# Allegro board shensen hv mppc_carrier.brd
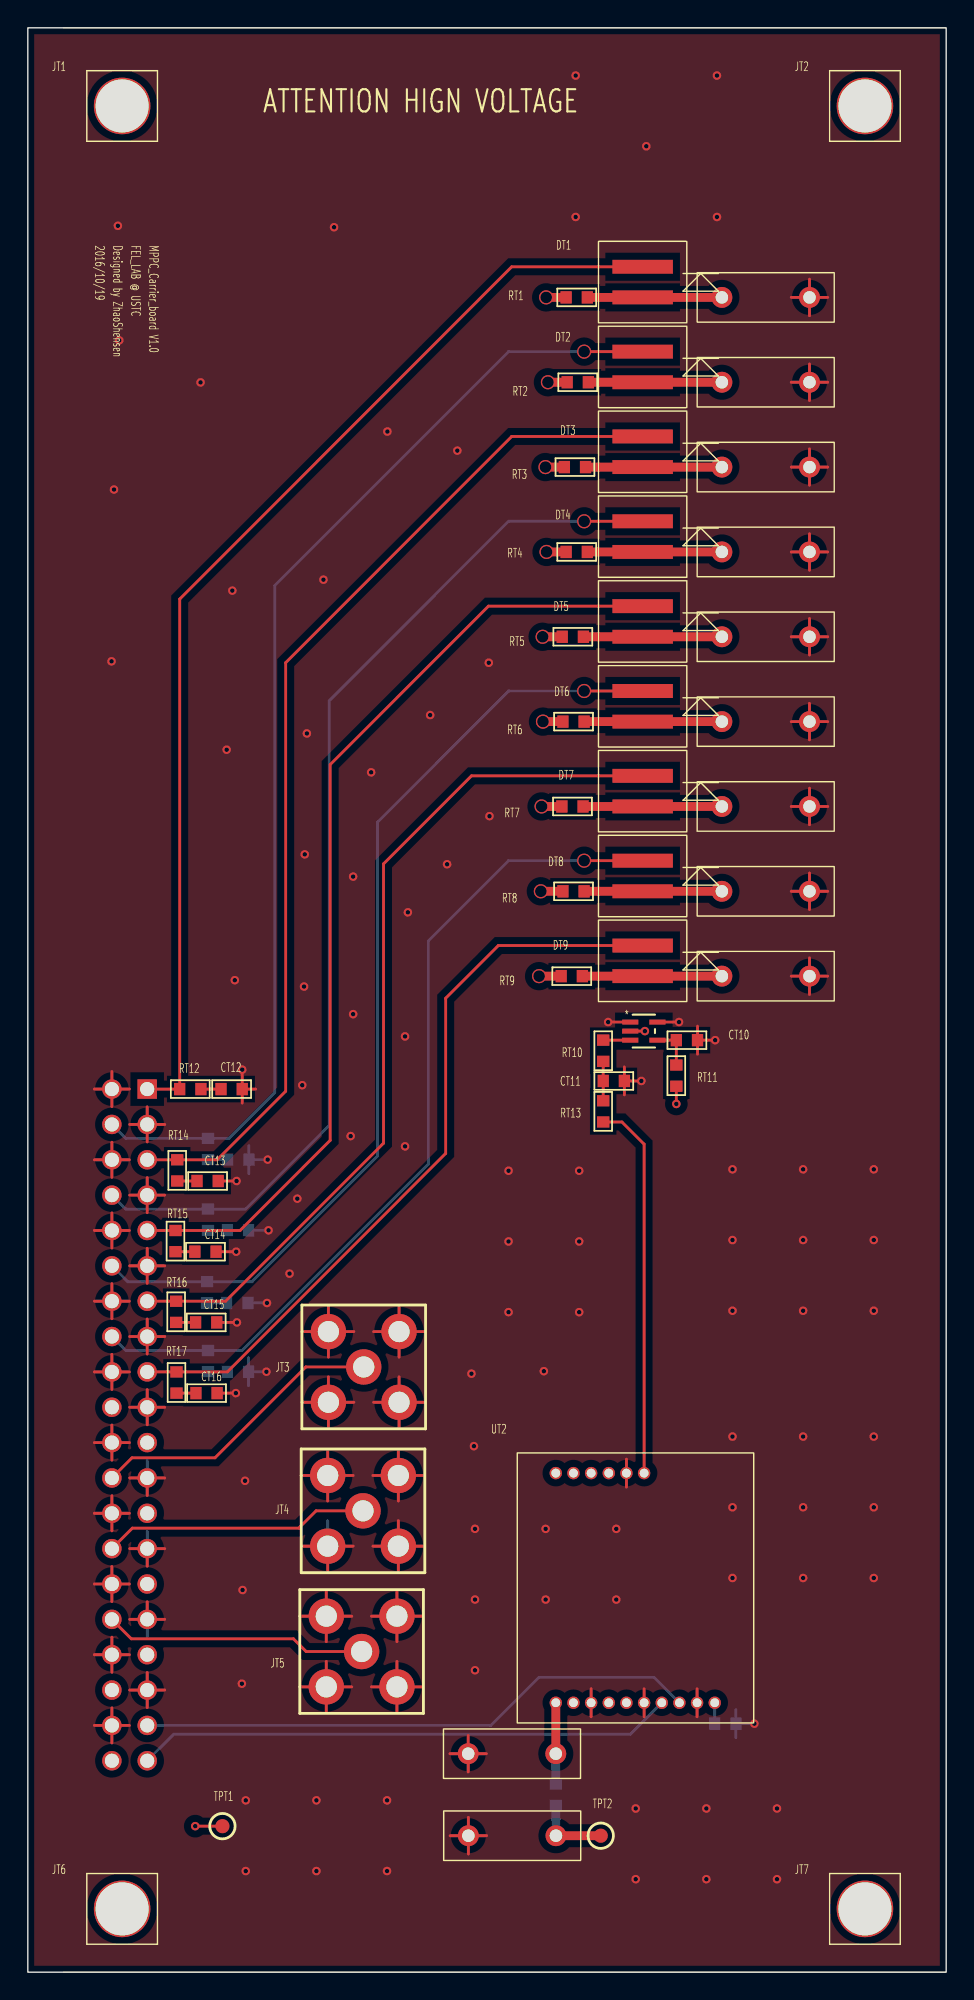
[diagram p0: board, top side]
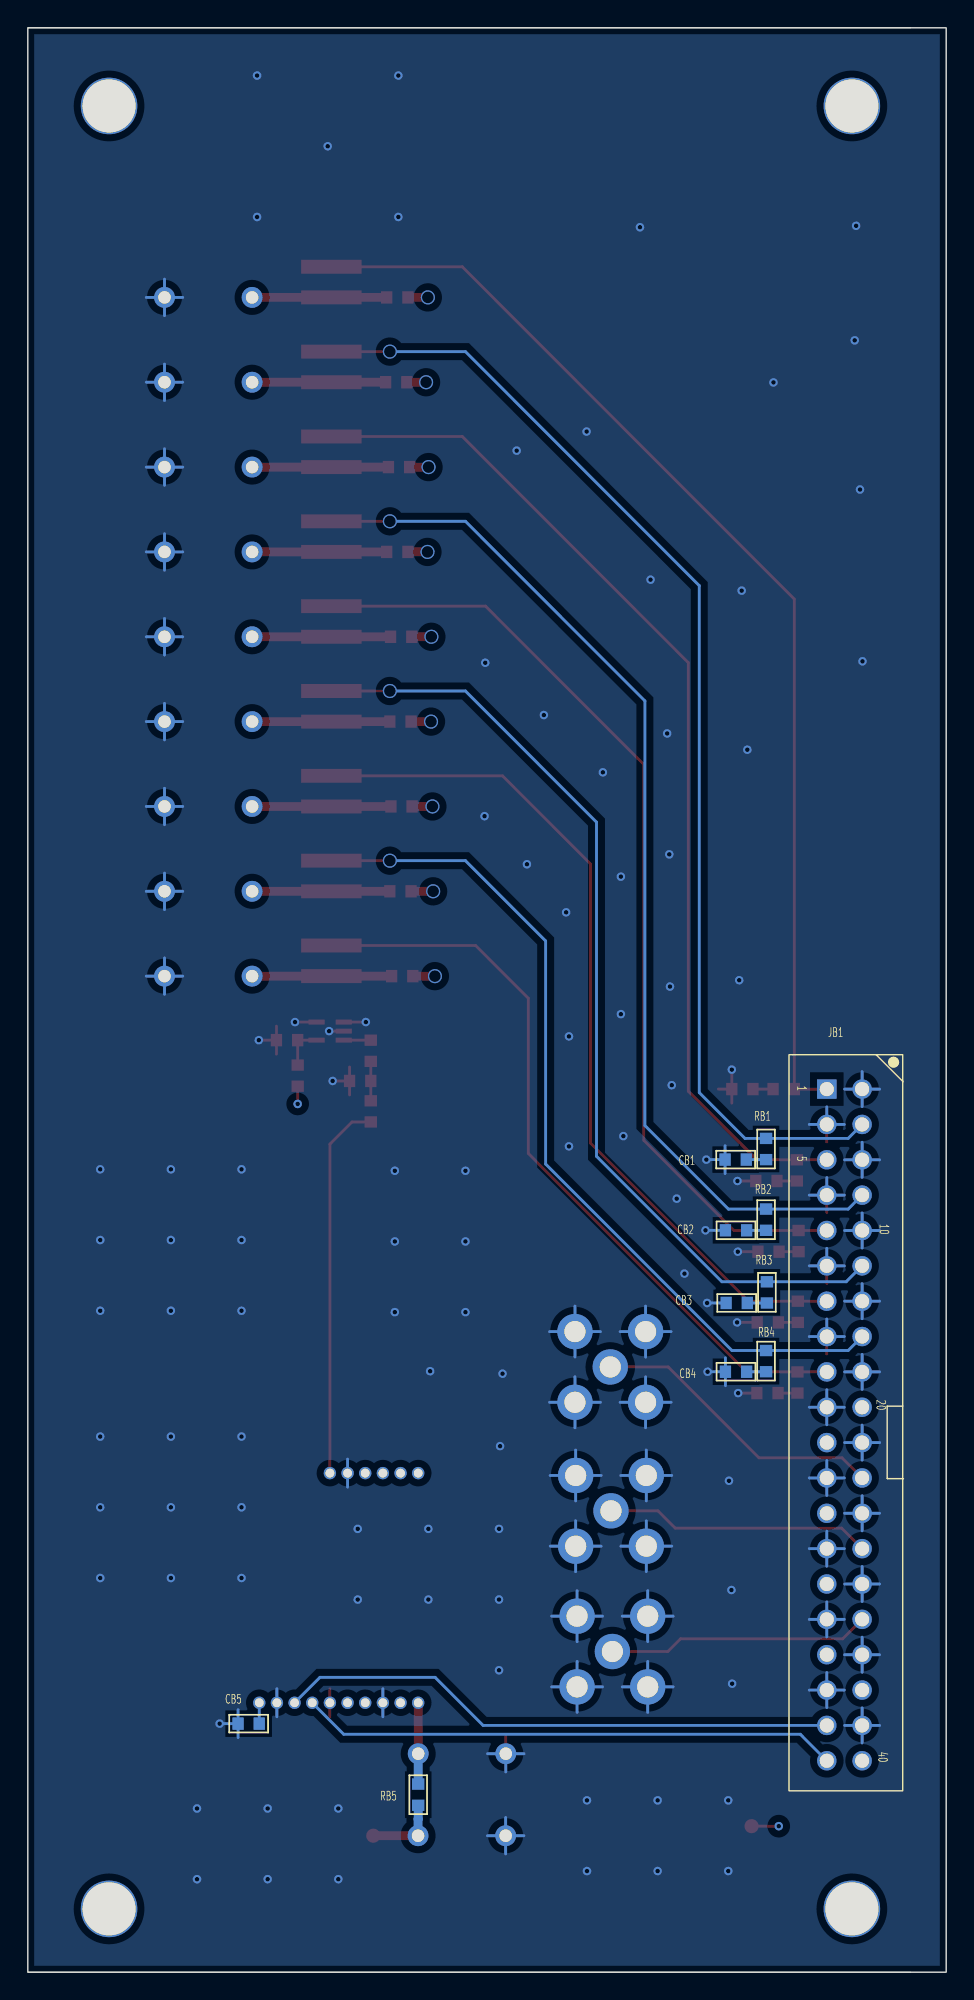
[diagram p1: board, bottom side, seen from below]

Outline 66.04 x 139.7 mm; copper layers: TOP, GND, POWER, BOTTOM. Coordinates in mm from the lower left corner of the outline.
Outline path: rectangle 0,0 66.04,139.7 ; 2.54,139.7 66.04,139.7 ; 66.04,0 2.54,0

## Placement (name value [footprint] x y rotation side)
CB1  100n  [SC0603]  15.14 58.38 0 bottom
CB2  100n  [SC0603]  15.11 53.3 0 bottom
CB3  100n  [SC0603]  15.06 48.08 0 bottom
CB4  100n  [SC0603]  15.11 43.14 0 bottom
CB5  0.1u  [SC0603]  50.16 17.86 0 bottom
CT1  100n  [CHV]  49.91 120.33 0 top
CT2  100n  [CHV]  49.91 114.24 0 top
CT3  100n  [CHV]  49.91 108.14 0 top
CT4  100n  [CHV]  49.91 102.04 0 top
CT5  100n  [CHV]  49.91 95.95 0 top
CT6  100n  [CHV]  49.91 89.85 0 top
CT7  100n  [CHV]  49.91 83.76 0 top
CT8  100n  [CHV]  49.91 77.66 0 top
CT9  100n  [CHV]  49.91 71.56 0 top
CT10  0.1u  [SC0603]  47.4 66.96 0 top
CT11  0.1u  [SC0603]  42.14 64.03 0 top
CT12  100n  [SC0603]  14.66 63.45 0 top
CT13  100n  [SC0603]  12.93 56.85 0 top
CT14  100n  [SC0603]  12.78 51.77 0 top
CT15  100n  [SC0603]  12.83 46.69 0 top
CT16  100n  [SC0603]  12.85 41.61 0 top
CT17  47n  [CHV]  37.97 15.7 180 top
CT18  47n  [CHV]  37.98 9.8 180 top
DT1  S12572-010P  [MPPC33]  42.04 119.51 0 top
DT2  S12572-010P  [MPPC33]  42.04 113.41 0 top
DT3  S12572-010P  [MPPC33]  42.04 107.32 0 top
DT4  S12572-015P  [MPPC33]  42.04 101.22 0 top
DT5  S12572-015P  [MPPC33]  42.04 95.12 0 top
DT6  S12572-015P  [MPPC33]  42.04 89.03 0 top
DT7  S12572-025P  [MPPC33]  42.04 82.93 0 top
DT8  S12572-025P  [MPPC33]  42.04 76.84 0 top
DT9  S12572-025P  [MPPC33]  42.04 70.74 0 top
JB1  CON40B  [CON_40R2_PG100RG100_B]  7.26 39.24 270 bottom
JT1  CON1  [FASTENPOINT]  6.78 134.09 0 top
JT2  CON1  [FASTENPOINT]  60.2 134.09 0 top
JT3  SMA  [SMA5-TF]  24.16 43.48 0 top
JT4  SMA  [SMA5-TF]  24.1 33.15 0 top
JT5  SMA  [SMA5-TF]  24 23.04 0 top
JT6  CON1  [FASTENPOINT]  6.78 4.55 0 top
JT7  CON1  [FASTENPOINT]  60.2 4.55 0 top
NOREF  -  []  0 139.7 0 top
NOREF#2  -  []  0 0 90 top
NOREF#3  -  []  60.2 4.55 90 top
NOREF#4  -  []  6.78 4.55 0 top
RB1  51.1  [SR0603]  12.95 59.14 270 bottom
RB2  51.1  [SR0603]  12.95 54.06 270 bottom
RB3  51.1  [SR0603]  12.89 48.84 270 bottom
RB4  51.1  [SR0603]  12.95 43.9 270 bottom
RB5  10  [SR0603]  37.97 12.75 270 bottom
RT1  100k  [SR0603]  39.47 120.33 0 top
RT2  100k  [SR0603]  39.55 114.24 0 top
RT3  100k  [SR0603]  39.34 108.14 0 top
RT4  100k  [SR0603]  39.47 102.04 0 top
RT5  100k  [SR0603]  39.19 95.95 0 top
RT6  100k  [SR0603]  39.24 89.85 0 top
RT7  100k  [SR0603]  39.17 83.76 0 top
RT8  100k  [SR0603]  39.24 77.66 0 top
RT9  100k  [SR0603]  39.12 71.56 0 top
RT10  1.5k  [SR0603]  41.38 66.2 90 top
RT11  10  [SR0603]  46.63 64.41 90 top
RT12  51.1  [SR0603]  11.68 63.45 0 top
RT13  1k  [SR0603]  41.38 61.85 90 top
RT14  51.1  [SR0603]  10.74 57.61 270 top
RT15  51.1  [SR0603]  10.62 52.53 270 top
RT16  51.1  [SR0603]  10.67 47.45 270 top
RT17  51.1  [SR0603]  10.69 42.37 270 top
TPT1  TEST POINT  [TP-40-SMD]  14 10.49 0 top
TPT2  TEST POINT  [TP-40-SMD]  41.2 9.8 0 top
UT1  LM94021  [MAA05A]  44.3 67.61 0 top
UT2  C11204-01  [C11204_01]  52.2 17.91 90 top

## Library data of the parts
CB1-CB5 CT1-CT18 = CAP NP
DT1-DT9 = DIODE PIN
JB1 = CON40A
JT1 JT2 JT6 JT7 = CON1
JT3-JT5 = SMA-5
RB1-RB5 RT1-RT17 = R
TPT1 TPT2 = TEST POINT
UT1 = LM94021
UT2 = C11204-01

## Footprints (pads in the part's own frame, mm; a bottom-side part is the same pattern mirrored in y, then rotated)
C11204_01
  round 0.889 hole 0.635: 1(1.45,2.8) 2(1.45,4.07) 3(1.45,5.34) 4(1.45,6.61) 5(1.45,7.88) 6(1.45,9.15) 7(1.45,10.42) 8(1.45,11.69) 9(1.45,12.96) 10(1.45,14.23) 11(17.95,14.23) 12(17.95,12.96) 13(17.95,11.69) 14(17.95,10.42) 15(17.95,9.15) 16(17.95,7.88)
CHV
  round 1.5 hole 0.9: 1(0,0) 2(6.299,0)
CON_40R2_PG100RG100_B
  rect 1.397x1.397 hole 1.016: 1(-24.206,-1.321)
  round 1.397 hole 1.016: 2(-24.206,1.219) 3(-21.666,-1.321) 4(-21.666,1.219) 5(-19.126,-1.321) 6(-19.126,1.219) 7(-16.586,-1.321) 8(-16.586,1.219) 9(-14.046,-1.321) 10(-14.046,1.219) 11(-11.506,-1.321) 12(-11.506,1.219) 13(-8.966,-1.321) 14(-8.966,1.219) 15(-6.426,-1.321) 16(-6.426,1.219) 17(-3.886,-1.321) 18(-3.886,1.219) 19(-1.346,-1.321) 20(-1.346,1.219) 21(1.194,-1.321) 22(1.194,1.219) 23(3.734,-1.321) 24(3.734,1.219) 25(6.274,-1.321) 26(6.274,1.219) 27(8.814,-1.321) 28(8.814,1.219) 29(11.354,-1.321) 30(11.354,1.219) 31(13.894,-1.321) 32(13.894,1.219) 33(16.434,-1.321) 34(16.434,1.219) 35(18.974,-1.321) 36(18.974,1.219) 37(21.514,-1.321) 38(21.514,1.219) 39(24.054,-1.321) 40(24.054,1.219)
FASTENPOINT
  round 4.064 hole 3.81: 1(0,0)
MAA05A
  rect 1.168x0.356 smd: 1(-0.978,0.65) 2(-0.978,0) 3(-0.978,-0.65) 4(0.978,-0.65) 5(0.978,0.65)
MPPC33
  rect 4.35x1 smd: 1(2.175,0.825) 2(2.175,3.025)
SC0603
  rect 0.813x0.889 smd: 1(-0.762,0) 2(0.762,0)
SMA5-TF
  round 2.54 hole 1.524: 1(0,0) 2(2.54,-2.54) 3(2.54,2.54) 4(-2.54,2.54) 5(-2.54,-2.54)
SR0603
  rect 0.813x0.889 smd: 1(-0.762,0) 2(0.762,0)
TP-40-SMD
  round 1.016 smd: 1(0,0)

## Nets
GND_POWER: CB1.2 CB2.2 CB3.2 CB4.2 CB5.2 CT1.2 CT2.2 CT3.2 CT4.2 CT5.2 CT6.2 CT7.2 CT8.2 CT9.2 CT10.2 CT11.2 CT12.2 CT13.2 CT14.2 CT15.2 CT16.2 CT17.2 CT18.2 JB1.2 JB1.3 JB1.6 JB1.7 JB1.10 JB1.11 JB1.14 JB1.15 JB1.18 JB1.19 JB1.22 JB1.23 JB1.26 JB1.27 JB1.30 JB1.31 JB1.34 JB1.35 JB1.38 JT3.2 JT3.3 JT3.4 JT3.5 JT4.2 JT4.3 JT4.4 JT4.5 JT5.2 JT5.3 JT5.4 JT5.5 UT1.1(GS0) UT1.2(GND) UT1.5(GS1) UT2.2(GND#2) UT2.5(GND#5) UT2.8(GND#8) UT2.15(GND#15)
VCC: CB5.1 JB1.40 RT11.1 TPT1.1 UT2.1(VCC)
HV0: CT1.1 DT1.1(K) RT1.2
HV1: CT2.1 DT2.1(K) RT2.2
HV2: CT3.1 DT3.1(K) RT3.2
HV3: CT4.1 DT4.1(K) RT4.2
HV4: CT5.1 DT5.1(K) RT5.2
HV5: CT6.1 DT6.1(K) RT6.2
HV6: CT7.1 DT7.1(K) RT7.2
HV7: CT8.1 DT8.1(K) RT8.2
HV8: CT9.1 DT9.1(K) RT9.2
IN0: DT1.2(A) JB1.1 RT12.1
IN1: DT2.2(A) JB1.4 RB1.1
IN2: DT3.2(A) JB1.5 RT14.1
IN3: DT4.2(A) JB1.8 RB2.1
IN4: DT5.2(A) JB1.9 RT15.1
IN5: DT6.2(A) JB1.12 RB3.1
IN6: DT7.2(A) JB1.13 RT16.1
IN7: DT8.2(A) JB1.16 RB4.1
IN8: DT9.2(A) JB1.17 RT17.1
RXD: JB1.37 UT2.3(RXD)
SIPM_HV: CT18.1 RB5.2 RT1.1 RT2.1 RT3.1 RT4.1 RT5.1 RT6.1 RT7.1 RT8.1 RT9.1 TPT2.1
TEST1: JB1.24 JT3.1
TEST2: JB1.28 JT4.1
TEST3: JB1.32 JT5.1
TXD: JB1.39 UT2.4(TXD)
N16788031: CT17.1 RB5.1 UT2.10(VO)
N16788117: CT11.1 RT10.1 RT13.2
N16788126: RT10.2 UT1.3(OUT)
N16788174: CT10.1 RT11.2 UT1.4(VDD)
N16791326: RT13.1 UT2.16(TEMP)
N167802631: CB1.1 RB1.2
N167802961: CT13.1 RT14.2
N167817311: CB2.1 RB2.2
N167818700: CT14.1 RT15.2
N167818981: CB3.1 RB3.2
N167819361: CT15.1 RT16.2
N167820930: CB4.1 RB4.2
N167821211: CT16.1 RT17.2
N167839260: CT12.1 RT12.2

Pads without a net: JB1 20 21 25 29 33 36; JT1 1; JT2 1; JT6 1; JT7 1; UT2 6 7 9 11 12 13 14

## Via types
v1: diameter 1.016, hole 0.838, TOP to BOTTOM, 13 vias
v2: diameter 0.61, hole 0.33, TOP to BOTTOM, 100 vias

## Routing (per net, layer and track width the routed paths; a pad name or vN(x,y) marks a point on that pad's centre or on a via; arc(x,y) is an arc through that point)
GND_POWER: length 516.5
  TOP w0.203: JB1.6 6.05,59.63 ; JB1.6 7.3,58.37 ; JB1.6 4.79,58.37 ; JB1.6 6.05,57.11 ; 54.9,71.56 CT9.2 ; CT9.2 57.52,71.56 ; CT9.2 56.21,70.25 ; CT9.2 56.21,72.87 ; 26.64,33.86 JT4.3 ; JT4.3 26.64,37.52 ; JT4.3 28.47,35.69 ; JT4.3 24.82,35.69 ; 7.33,30.43 JB1.27 ; JB1.27 8.59,29.17 ; JB1.27 9.84,30.43 ; JT5.3 28.37,25.58 ; JT5.3 24.71,25.58 ; JT5.3 26.54,23.75 ; JT5.3 26.54,27.41 ; 24.87,40.94 JT3.2 ; JT3.2 26.7,42.77 ; JT3.2 26.7,39.12 ; JT3.2 28.52,40.94 ; JT3.3 26.7,47.85 ; JT3.3 24.87,46.02 ; JT3.3 26.7,44.2 ; JT3.3 28.52,46.02 ; 54.9,83.76 CT7.2 ; CT7.2 56.21,85.07 ; CT7.2 57.52,83.76 ; CT7.2 56.21,82.45 ; 6.05,36.79 JB1.22 ; JB1.22 6.05,39.31 ; JB1.22 4.79,38.05 ; JB1.22 7.3,38.05 ; 7.33,50.75 JB1.11 ; JB1.11 8.59,52.01 ; JB1.11 8.59,49.49 ; JB1.11 9.84,50.75 ; CT6.2 57.52,89.85 ; CT6.2 54.9,89.85 ; CT6.2 56.21,91.16 ; CT6.2 56.21,88.54 ; 54.9,95.95 CT5.2 ; CT5.2 57.52,95.95 ; CT5.2 56.21,97.26 ; CT5.2 56.21,94.64 ; 21.62,39.12 JT3.5 ; JT3.5 19.79,40.94 ; JT3.5 23.44,40.94 ; JT3.5 21.62,42.77 ; 4.79,27.89 JB1.30 ; JB1.30 6.05,26.63 ; JB1.30 6.05,29.15 ; JB1.30 7.3,27.89 ; 4.79,43.13 JB1.18 ; JB1.18 7.3,43.13 ; JB1.18 6.05,44.39 ; JB1.18 6.05,41.87 ; JB1.26 6.05,34.23 ; JB1.26 7.3,32.97 ; JB1.26 6.05,31.71 ; JB1.26 4.79,32.97 ; 56.21,119.02 CT1.2 ; CT1.2 56.21,121.64 ; CT1.2 54.9,120.33 ; CT1.2 57.52,120.33 ; JB1.15 8.59,46.93 ; JB1.15 9.84,45.67 ; JB1.15 8.59,44.41 ; JB1.15 7.33,45.67 ; 26.54,18.67 JT5.2 ; JT5.2 24.71,20.5 ; JT5.2 26.54,22.33 ; JT5.2 28.37,20.5 ; CT10.2 48.16,67.97 ; CT10.2 48.16,65.96 ; CT10.2 v2(49.43,66.96) ; 6.05,46.95 JB1.14 ; JB1.14 7.3,48.21 ; JB1.14 6.05,49.47 ; JB1.14 4.79,48.21 ; 7.33,25.35 JB1.31 ; JB1.31 9.84,25.35 ; JB1.31 8.59,26.61 ; CT12.2 v2(15.42,64.85) ; CT12.2 16.38,63.45 ; CT12.2 15.42,62.45 ; JT4.4 21.56,37.52 ; JT4.4 19.74,35.69 ; JT4.4 23.39,35.69 ; JT4.4 21.56,33.86 ; JT3.4 21.62,47.85 ; JT3.4 21.62,44.2 ; JT3.4 19.79,46.02 ; JT3.4 23.44,46.02 ; 40.51,18.35 UT2.8 40.51,20.36 ; UT1.2 v2(44.37,67.61) ; JT4.2 28.47,30.61 ; JT4.2 26.64,32.44 ; JT4.2 24.82,30.61 ; JT4.2 26.64,28.78 ; 43.05,36.86 UT2.15 43.05,34.85 ; CT11.2 42.9,65.04 ; CT11.2 v2(44.12,64.03) ; CT11.2 42.9,63.03 ; 21.46,23.75 JT5.4 ; JT5.4 19.63,25.58 ; JT5.4 21.46,27.41 ; JT5.4 23.29,25.58 ; 54.9,77.66 CT8.2 ; CT8.2 56.21,76.35 ; CT8.2 57.52,77.66 ; CT8.2 56.21,78.97 ; UT1.1 v2(41.73,68.26) ; 56.21,100.73 CT4.2 ; CT4.2 56.21,103.35 ; CT4.2 54.9,102.04 ; CT4.2 57.52,102.04 ; JB1.19 9.84,40.59 ; JB1.19 7.33,40.59 ; JB1.19 8.59,39.33 ; JB1.19 8.59,41.85 ; CT2.2 57.52,114.24 ; CT2.2 54.9,114.24 ; CT2.2 56.21,115.55 ; CT2.2 56.21,112.93 ; 30.36,15.7 CT17.2 ; CT17.2 32.98,15.7 ; CT17.2 31.67,17.01 ; CT17.2 31.67,14.39 ; 8.59,19.01 JB1.35 ; JB1.35 9.84,20.27 ; JB1.35 8.59,21.53 ; JB1.35 7.33,20.27 ; CT13.2 v2(15.01,56.85) ; JB1.38 7.3,17.73 ; JB1.38 4.79,17.73 ; JB1.38 6.05,16.47 ; JB1.38 6.05,18.99 ; 21.56,28.78 JT4.5 ; JT4.5 23.39,30.61 ; JT4.5 19.74,30.61 ; 4.79,22.81 JB1.34 ; JB1.34 6.05,21.55 ; JB1.34 7.3,22.81 ; JB1.34 6.05,24.07 ; CT3.2 57.52,108.14 ; CT3.2 56.21,106.83 ; CT3.2 54.9,108.14 ; CT3.2 56.21,109.45 ; CT18.2 32.99,9.8 ; CT18.2 31.68,8.5 ; CT18.2 31.68,11.11 ; CT18.2 30.37,9.8 ; JB1.2 6.05,64.71 ; JB1.2 6.05,62.19 ; JB1.2 4.79,63.45 ; JB1.2 7.3,63.45 ; JB1.23 9.84,35.51 ; JB1.23 8.59,34.25 ; JB1.23 7.33,35.51 ; 8.59,59.65 JB1.3 ; JB1.3 7.33,60.91 ; JB1.3 9.84,60.91 ; JB1.3 8.59,62.17 ; 7.33,55.83 JB1.7 ; JB1.7 9.84,55.83 ; JB1.7 8.59,57.09 ; JB1.7 8.59,54.57 ; JB1.10 7.3,53.29 ; JB1.10 6.05,52.03 ; JB1.10 4.79,53.29 ; JB1.10 6.05,54.55 ; 48.13,18.35 UT2.2 48.13,20.36 ; 21.46,18.67 JT5.5 ; JT5.5 19.63,20.5 ; JT5.5 21.46,22.33 ; JT5.5 23.29,20.5 ; 44.32,18.35 UT2.5 44.32,20.36 ; UT1.5 v2(46.83,68.26) ; CT16.2 v2(14.96,41.61) ; CT15.2 v2(15.04,46.69) ; CT14.2 v2(14.99,51.77)
  BOTTOM w0.203: 31.67,14.39 CT17.2 ; CT17.2 32.98,15.7 ; CT17.2 30.36,15.7 ; 7.33,30.43 JB1.27 ; JB1.27 8.59,31.69 ; JB1.27 8.59,29.17 ; JB1.27 9.84,30.43 ; 54.9,114.24 CT2.2 ; CT2.2 57.52,114.24 ; CT2.2 56.21,115.55 ; CT2.2 56.21,112.93 ; JB1.6 7.3,58.37 ; JB1.6 6.05,59.63 ; JB1.6 4.79,58.37 ; JB1.6 6.05,57.11 ; JB1.3 9.84,60.91 ; JB1.3 7.33,60.91 ; JB1.3 8.59,62.17 ; CT9.2 57.52,71.56 ; CT9.2 56.21,70.25 ; CT9.2 56.21,72.87 ; CT9.2 54.9,71.56 ; JB1.38 6.05,18.99 ; JB1.38 7.3,17.73 ; JB1.38 6.05,16.47 ; JB1.38 4.79,17.73 ; JT4.5 23.39,30.61 ; JT4.5 21.56,32.44 ; JT4.5 21.56,28.78 ; JT4.5 19.74,30.61 ; 24.82,35.69 JT4.3 ; JT4.3 28.47,35.69 ; JT4.3 26.64,37.52 ; JT4.3 26.64,33.86 ; 19.63,25.58 JT5.4 ; JT5.4 21.46,27.41 ; JT5.4 21.46,23.75 ; JT5.4 23.29,25.58 ; 26.54,18.67 JT5.2 ; JT5.2 28.37,20.5 ; JT5.2 24.71,20.5 ; JT5.2 26.54,22.33 ; 6.05,52.03 JB1.10 ; JB1.10 6.05,54.55 ; JB1.10 4.79,53.29 ; JB1.10 7.3,53.29 ; 56.21,119.02 CT1.2 ; CT1.2 54.9,120.33 ; CT1.2 57.52,120.33 ; CT1.2 56.21,121.64 ; CB3.2 v2(17.2,48.08) ; JT3.5 21.62,42.77 ; JT3.5 23.44,40.94 ; JT3.5 21.62,39.12 ; JT3.5 19.79,40.94 ; JT5.3 28.37,25.58 ; JT5.3 26.54,27.41 ; JT5.3 24.71,25.58 ; JT5.3 26.54,23.75 ; 7.33,45.67 JB1.15 ; JB1.15 9.84,45.67 ; JB1.15 8.59,46.93 ; JT3.2 28.52,40.94 ; JT3.2 26.7,39.12 ; JT3.2 24.87,40.94 ; JT3.2 26.7,42.77 ; JB1.19 8.59,41.85 ; JB1.19 7.33,40.59 ; JB1.19 9.84,40.59 ; JB1.19 8.59,39.33 ; CB5.2 50.92,18.86 ; CB5.2 50.92,16.85 ; CB5.2 v2(52.25,17.86) ; JT4.2 28.47,30.61 ; JT4.2 26.64,32.44 ; JT4.2 24.82,30.61 ; JT4.2 26.64,28.78 ; 54.9,108.14 CT3.2 ; CT3.2 56.21,109.45 ; CT3.2 57.52,108.14 ; CT3.2 56.21,106.83 ; JB1.31 9.84,25.35 ; JB1.31 7.33,25.35 ; JB1.31 8.59,24.09 ; JB1.31 8.59,26.61 ; JT3.3 28.52,46.02 ; JT3.3 26.7,44.2 ; JT3.3 26.7,47.85 ; JT3.3 24.87,46.02 ; 7.33,35.51 JB1.23 ; JB1.23 9.84,35.51 ; JB1.23 8.59,36.77 ; JB1.23 8.59,34.25 ; 4.79,32.97 JB1.26 ; JB1.26 6.05,31.71 ; JB1.26 7.3,32.97 ; JB1.26 6.05,34.23 ; JB1.7 9.84,55.83 ; JB1.7 8.59,57.09 ; JB1.7 7.33,55.83 ; 21.46,18.67 JT5.5 ; JT5.5 19.63,20.5 ; JT5.5 21.46,22.33 ; JT5.5 23.29,20.5 ; 21.62,44.2 JT3.4 ; JT3.4 23.44,46.02 ; JT3.4 19.79,46.02 ; JT3.4 21.62,47.85 ; CT8.2 57.52,77.66 ; CT8.2 54.9,77.66 ; CT8.2 56.21,76.35 ; CT8.2 56.21,78.97 ; JB1.35 8.59,21.53 ; JB1.35 7.33,20.27 ; JB1.35 9.84,20.27 ; JB1.35 8.59,19.01 ; CB1.2 15.9,59.39 ; CB1.2 v2(17.25,58.38) ; CB1.2 15.9,57.38 ; 48.13,20.36 UT2.2 48.13,18.35 ; 6.05,41.87 JB1.18 ; JB1.18 4.79,43.13 ; JB1.18 6.05,44.39 ; JB1.18 7.3,43.13 ; 6.05,21.55 JB1.34 ; JB1.34 4.79,22.81 ; JB1.34 6.05,24.07 ; JB1.34 7.3,22.81 ; CB2.2 v2(17.31,53.3) ; 6.05,36.79 JB1.22 ; JB1.22 7.3,38.05 ; JB1.22 4.79,38.05 ; JB1.22 6.05,39.31 ; CB4.2 15.88,44.15 ; CB4.2 v2(17.16,43.14) ; CB4.2 15.88,42.14 ; 54.9,102.04 CT4.2 ; CT4.2 57.52,102.04 ; CT4.2 56.21,100.73 ; CT4.2 56.21,103.35 ; 6.05,46.95 JB1.14 ; JB1.14 7.3,48.21 ; JB1.14 6.05,49.47 ; JB1.14 4.79,48.21 ; JB1.30 7.3,27.89 ; JB1.30 6.05,29.15 ; JB1.30 6.05,26.63 ; JB1.30 4.79,27.89 ; 21.56,33.86 JT4.4 ; JT4.4 23.39,35.69 ; JT4.4 19.74,35.69 ; JT4.4 21.56,37.52 ; JB1.2 7.3,63.45 ; JB1.2 6.05,62.19 ; JB1.2 4.79,63.45 ; JB1.2 6.05,64.71 ; 56.21,94.64 CT5.2 ; CT5.2 57.52,95.95 ; CT5.2 54.9,95.95 ; CT5.2 56.21,97.26 ; CT7.2 56.21,85.07 ; CT7.2 54.9,83.76 ; CT7.2 56.21,82.45 ; CT7.2 57.52,83.76 ; 31.68,8.5 CT18.2 ; CT18.2 30.37,9.8 ; CT18.2 31.68,11.11 ; CT18.2 32.99,9.8 ; 40.51,20.36 UT2.8 40.51,18.35 ; CT6.2 56.21,91.16 ; CT6.2 54.9,89.85 ; CT6.2 56.21,88.54 ; CT6.2 57.52,89.85 ; JB1.11 9.84,50.75 ; JB1.11 8.59,52.01 ; JB1.11 7.33,50.75 ; 43.05,36.86 UT2.15 43.05,34.85
  vias: v2(6.02,94.18) v2(6.2,106.53) v2(6.48,125.48) v2(6.58,117.25) v2(12.42,114.22) v2(14.3,87.83) v2(14.71,99.26) v2(14.88,71.27) v2(15.44,27.46) v2(15.39,20.73) v2(15.62,35.31) v2(15.67,12.34) v2(15.67,7.26) v2(18.82,50.19) v2(19.38,55.58) v2(19.74,63.73) v2(19.91,80.31) v2(19.86,70.82) v2(20.07,89) v2(20.75,12.34) v2(20.75,7.26) v2(21.26,100.05) v2(22.02,125.37) v2(23.22,60.07) v2(23.39,78.71) v2(23.39,68.83) v2(24.69,86.21) v2(25.83,12.34) v2(25.83,7.26) v2(25.86,110.69) v2(27.13,67.23) v2(27.13,59.33) v2(27.33,76.15) v2(28.93,90.32) v2(30.15,79.6) v2(30.89,109.32) v2(31.9,43) v2(32.08,37.8) v2(32.16,31.85) v2(32.16,26.77) v2(32.16,21.69) v2(33.15,94.08) v2(33.2,83.06) v2(34.57,57.58) v2(34.57,52.5) v2(34.57,47.42) v2(37.11,43.18) v2(37.24,31.85) v2(37.24,26.77) v2(39.4,136.27) v2(39.4,126.11) v2(39.65,57.58) v2(39.65,52.5) v2(39.65,47.42) v2(42.32,31.85) v2(42.32,26.77) v2(43.71,11.76) v2(43.71,6.68) v2(44.48,131.19) v2(48.79,11.76) v2(48.79,6.68) v2(49.56,136.27) v2(49.56,126.11) v2(50.67,57.68) v2(50.67,52.6) v2(50.67,47.52) v2(50.67,38.48) v2(50.67,33.4) v2(50.67,28.32) v2(53.87,11.76) v2(53.87,6.68) v2(55.75,57.68) v2(55.75,52.6) v2(55.75,47.52) v2(55.75,38.48) v2(55.75,33.4) v2(55.75,28.32) v2(60.83,57.68) v2(60.83,52.6) v2(60.83,47.52) v2(60.83,38.48) v2(60.83,33.4) v2(60.83,28.32)
VCC: length 4.7
  TOP w0.203: TPT1.1 v2(12.04,10.49) ; RT11.1 v2(46.63,62.38)
  BOTTOM w0.203: UT2.1 CB5.1
HV0: length 9.7
  TOP w0.635: CT1.1 DT1.1 RT1.2
HV1: length 9.6
  TOP w0.635: CT2.1 DT2.1 RT2.2
HV2: length 9.8
  TOP w0.635: CT3.1 DT3.1 RT3.2
HV3: length 9.7
  TOP w0.635: CT4.1 DT4.1 RT4.2
HV4: length 10
  TOP w0.635: CT5.1 DT5.1 RT5.2
HV5: length 9.9
  TOP w0.635: RT6.2 DT6.1 CT6.1
HV6: length 10
  TOP w0.635: RT7.2 DT7.1 CT7.1
HV7: length 9.9
  TOP w0.635: RT8.2 DT8.1 CT8.1
HV8: length 10
  TOP w0.635: CT9.1 DT9.1 RT9.2
IN0: length 80.7
  TOP w0.203: JB1.1 RT12.1 10.92,98.66 34.8,122.53 DT1.2
IN1: length 83.3
  TOP w0.203: DT2.2 v1(40,116.44)
  BOTTOM w0.203: JB1.4 7.05,59.91 RB1.1 14.47,59.91 17.75,63.2 17.75,99.62 34.57,116.44 v1(40,116.44)
IN2: length 75.2
  TOP w0.203: DT3.2 34.8,110.34 18.54,94.08 18.54,63.3 13.61,58.37 RT14.1 JB1.5
IN3: length 76.9
  TOP w0.203: DT4.2 v1(40,104.24)
  BOTTOM w0.203: v1(40,104.24) 34.57,104.24 21.67,91.34 21.67,60.83 15.66,54.83 RB2.1 7.05,54.83 JB1.8
IN4: length 70
  TOP w0.203: DT5.2 33.12,98.15 21.74,86.77 21.74,59.77 15.27,53.29 RT15.1 JB1.9
IN5: length 70.3
  TOP w0.203: DT6.2 v1(40,92.05)
  BOTTOM w0.203: JB1.12 7.19,49.61 RB3.1 16.13,49.61 25.15,58.62 25.15,82.63 34.57,92.05 v1(40,92.05)
IN6: length 63
  TOP w0.203: JB1.13 RT16.1 14.22,48.21 25.58,59.56 25.58,79.63 31.9,85.96 DT7.2
IN7: length 62.6
  TOP w0.203: DT8.2 v1(40,79.86)
  BOTTOM w0.203: v1(40,79.86) 34.57,79.86 28.8,74.09 28.8,58.06 15.41,44.67 RB4.1 7.05,44.67 JB1.16
IN8: length 54.8
  TOP w0.203: JB1.17 RT17.1 14.35,43.13 30.05,58.83 30.05,69.98 33.83,73.76 DT9.2
RXD: length 40.5
  BOTTOM w0.203: UT2.3 45.03,21.18 36.75,21.18 33.3,17.73 JB1.37
SIPM_HV: length 18.5
  TOP w0.635: RT3.1 v1(37.22,108.14) ; RT5.1 v1(37.02,95.95) ; RT8.1 v1(36.89,77.66) ; RT9.1 v1(36.77,71.56) ; RT7.1 v1(36.94,83.76) ; CT18.1 TPT2.1 ; RT4.1 v1(37.3,102.04) ; RT6.1 v1(37.05,89.85) ; RT1.1 v1(37.27,120.33) ; RT2.1 v1(37.4,114.24)
  BOTTOM w0.635: CT18.1 37.98,11 37.97,11.01 RB5.2
TEST1: length 21.4
  TOP w0.203: JT3.1 19.99,43.48 13.46,36.96 7.49,36.96 JB1.24
TEST2: length 19.2
  TOP w0.203: JB1.28 7.52,31.9 19.48,31.9 20.73,33.15 JT4.1
TEST3: length 18.9
  TOP w0.203: JB1.32 7.44,23.95 19.1,23.95 20.01,23.04 JT5.1
TXD: length 38.7
  BOTTOM w0.203: JB1.39 10.49,17.09 43.32,17.09 UT2.4
N16788031: length 5.8
  TOP w0.635: UT2.10 CT17.1
  BOTTOM w0.635: CT17.1 RB5.1
N16788117: length 2.8
  TOP w0.203: RT10.1 CT11.1 RT13.2
N16788126: length 1.9
  TOP w0.203: UT1.3 RT10.2
N16788174: length 3.1
  TOP w0.203: UT1.4 CT10.1 RT11.2
N16791326: length 27.2
  TOP w0.203: RT13.1 42.72,61.09 44.32,59.49 UT2.16
N167802631: length 1.4
  BOTTOM w0.203: RB1.2 CB1.1
N167802961: length 1.4
  TOP w0.203: RT14.2 CT13.1
N167817311: length 1.4
  BOTTOM w0.203: RB2.2 CB2.1
N167818700: length 1.4
  TOP w0.203: RT15.2 CT14.1
N167818981: length 1.4
  BOTTOM w0.203: RB3.2 CB3.1
N167819361: length 1.4
  TOP w0.203: RT16.2 CT15.1
N167820930: length 1.4
  BOTTOM w0.203: RB4.2 CB4.1
N167821211: length 1.4
  TOP w0.203: RT17.2 CT16.1
N167839260: length 1.4
  TOP w0.203: 12.45,63.45 CT12.1

## Copper pours and planes (outline as drawn; the poured copper is in the pictures)
GND_POWER on TOP, BOTTOM: 65.58,0.46 0.46,0.46 0.46,139.24 65.58,139.24
GND_POWER on GND: 0,0 0,139.7 66.04,139.7 66.04,0
VCC on POWER: 0.74,25.5 18.31,25.5 18.31,5.54 44.86,5.54 44.86,56.79 39.55,56.79 39.55,69.44 64.97,69.44 64.97,1.07 0.74,1.07
SIPM_HV on POWER: 0.74,25.83 18.82,25.83 18.82,6.17 44.3,6.17 44.3,56.16 38.71,56.16 38.71,70 64.74,70 64.74,138.56 0.74,138.56

## Text on the board
Ref Des/Silkscreen Top: 2016/10/19 | Designed by ZhaoShensen | FEL_LAB @ USTC | MPPC_Carrier_board V1.0 | ATTENTION HIGN VOLTAGE
DIMENSION: FIGURE | SIZE | 13.0 | 25.0 | 33.0 | 35.43 | 40.0 | 60.0 | 150.0 | DRILL CHART: TOP to BOTTOM | ALL UNITS ARE IN MILS | PLATED | QTY | 17 | 16 | 13 | 22 | 40 | 15 | 4
